# Altium PCB IDC_BNC_Adapter.PCBDOC
Units mil, origin at the board's own origin, x right, y up, seen from the top; angles counter-clockwise.
Board outline 1764.14 x 3937 mil, 4 copper layers (TopLayer, Internal Plane 2, Signal Layer 1, BottomLayer), stack 61.54 mil thick; 45 components, 43 nets, 118 pads, 31 vias.
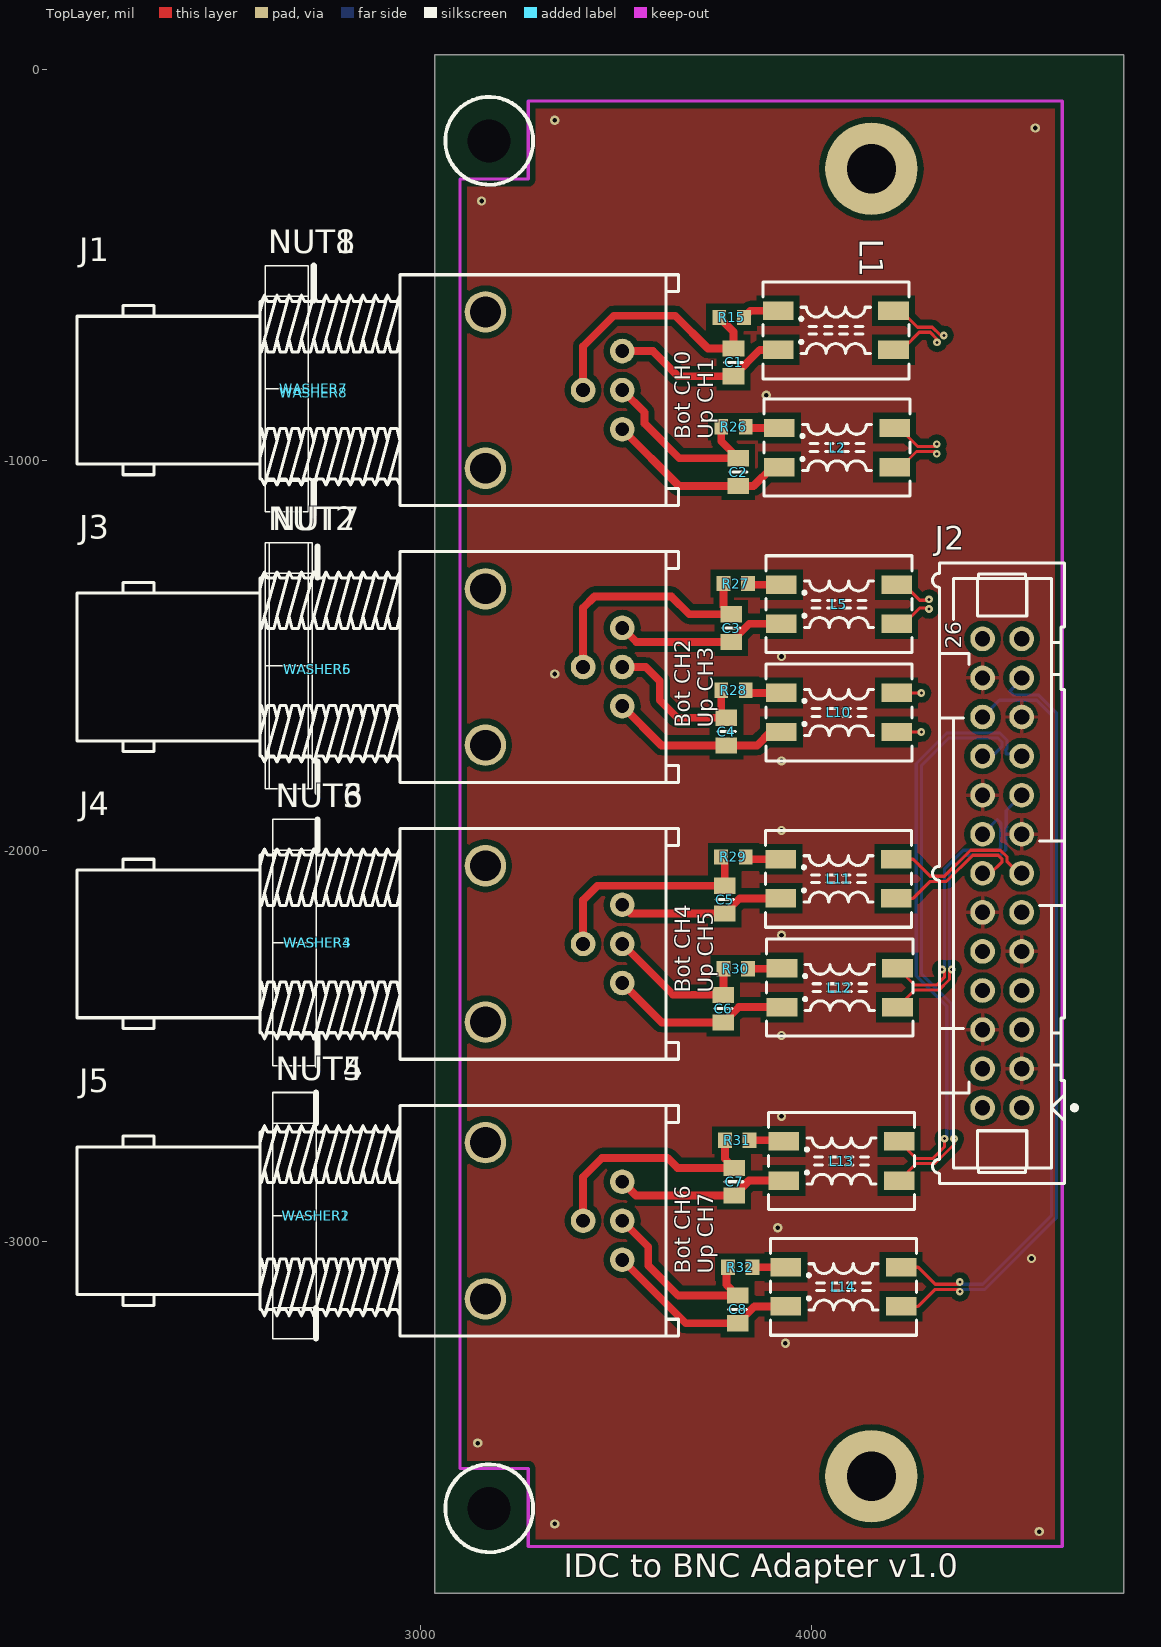
[diagram p0: TopLayer view]
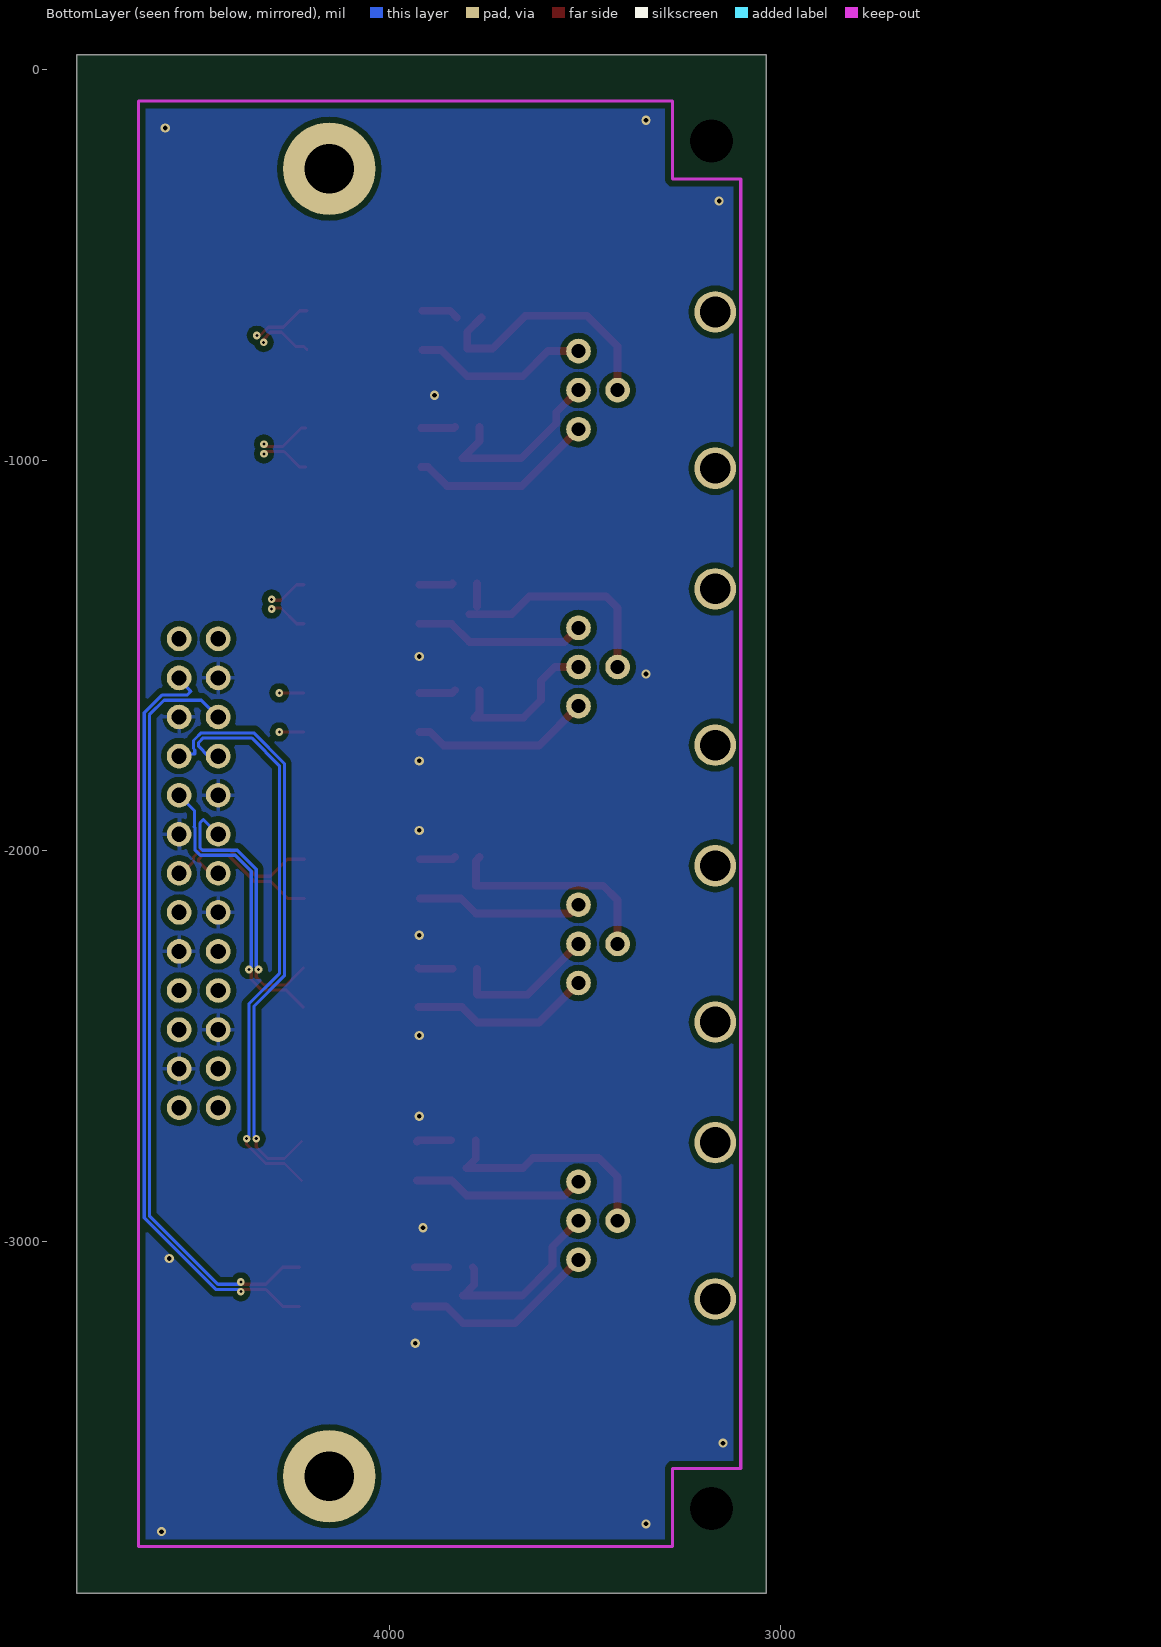
[diagram p1: BottomLayer view, seen from below]
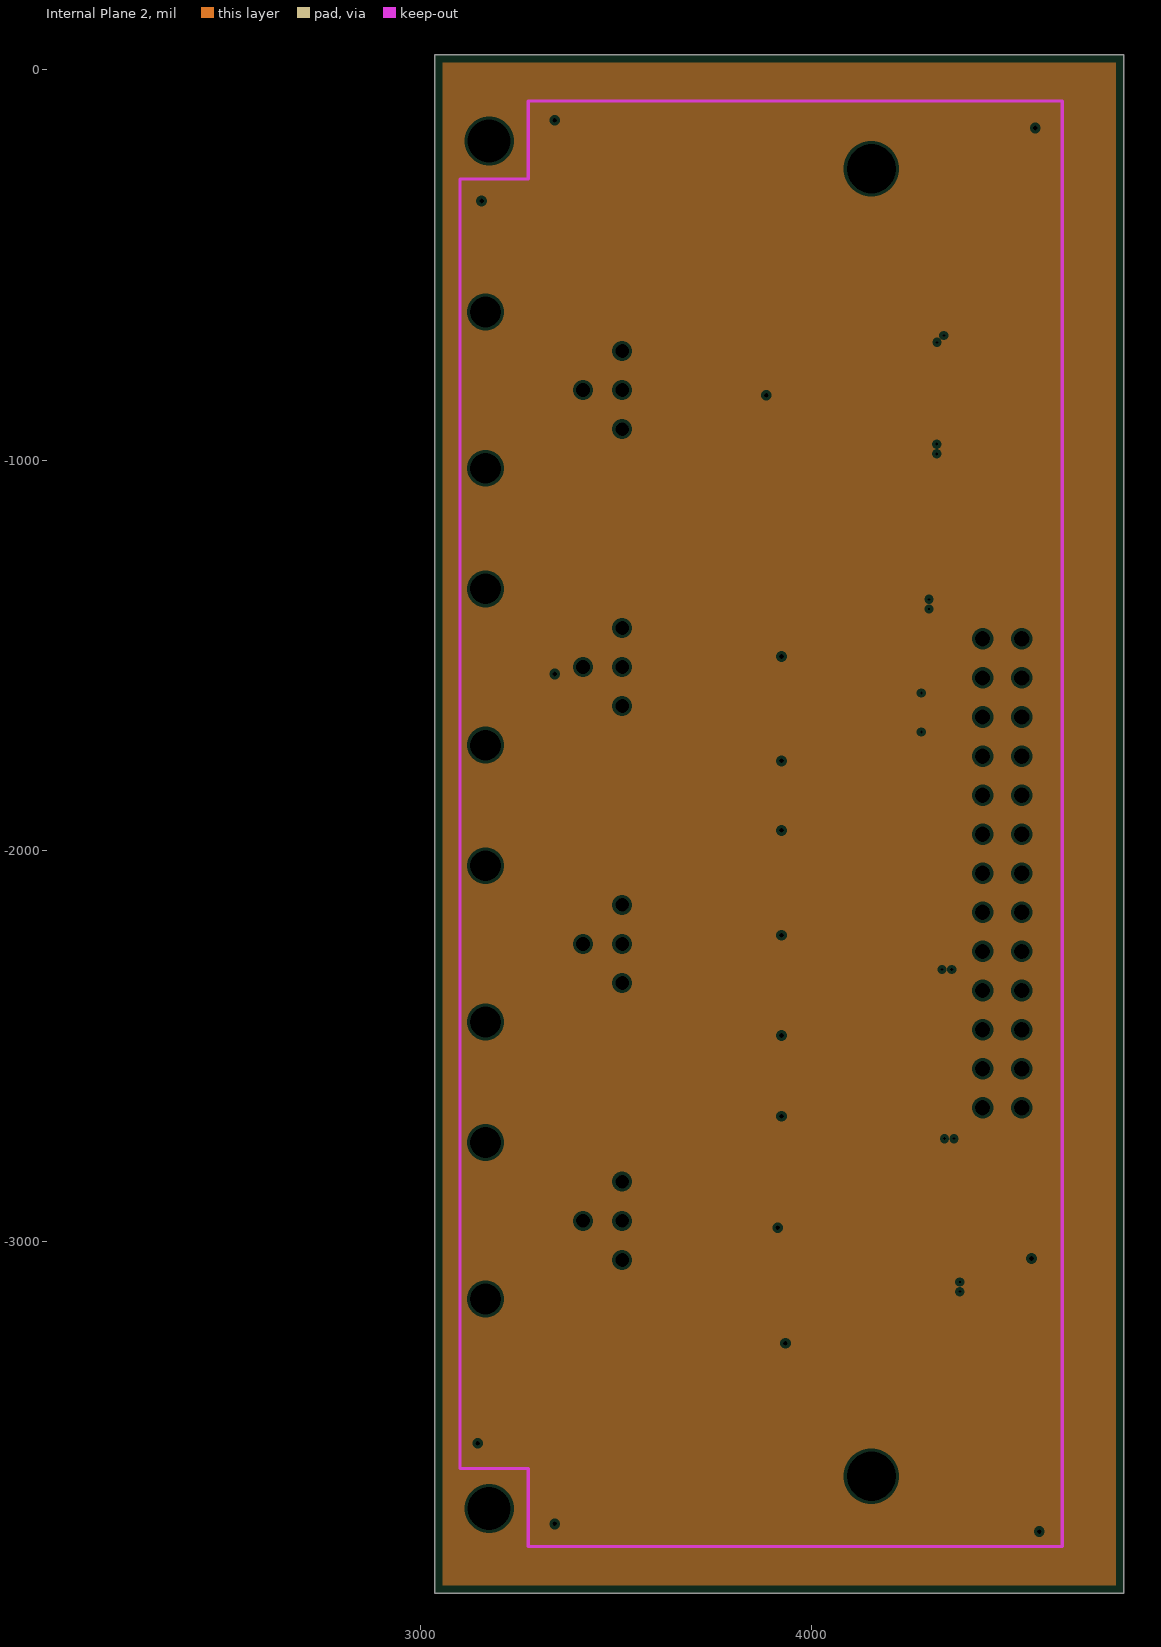
[diagram p2: Internal Plane 2, clearances drawn from the general rule]
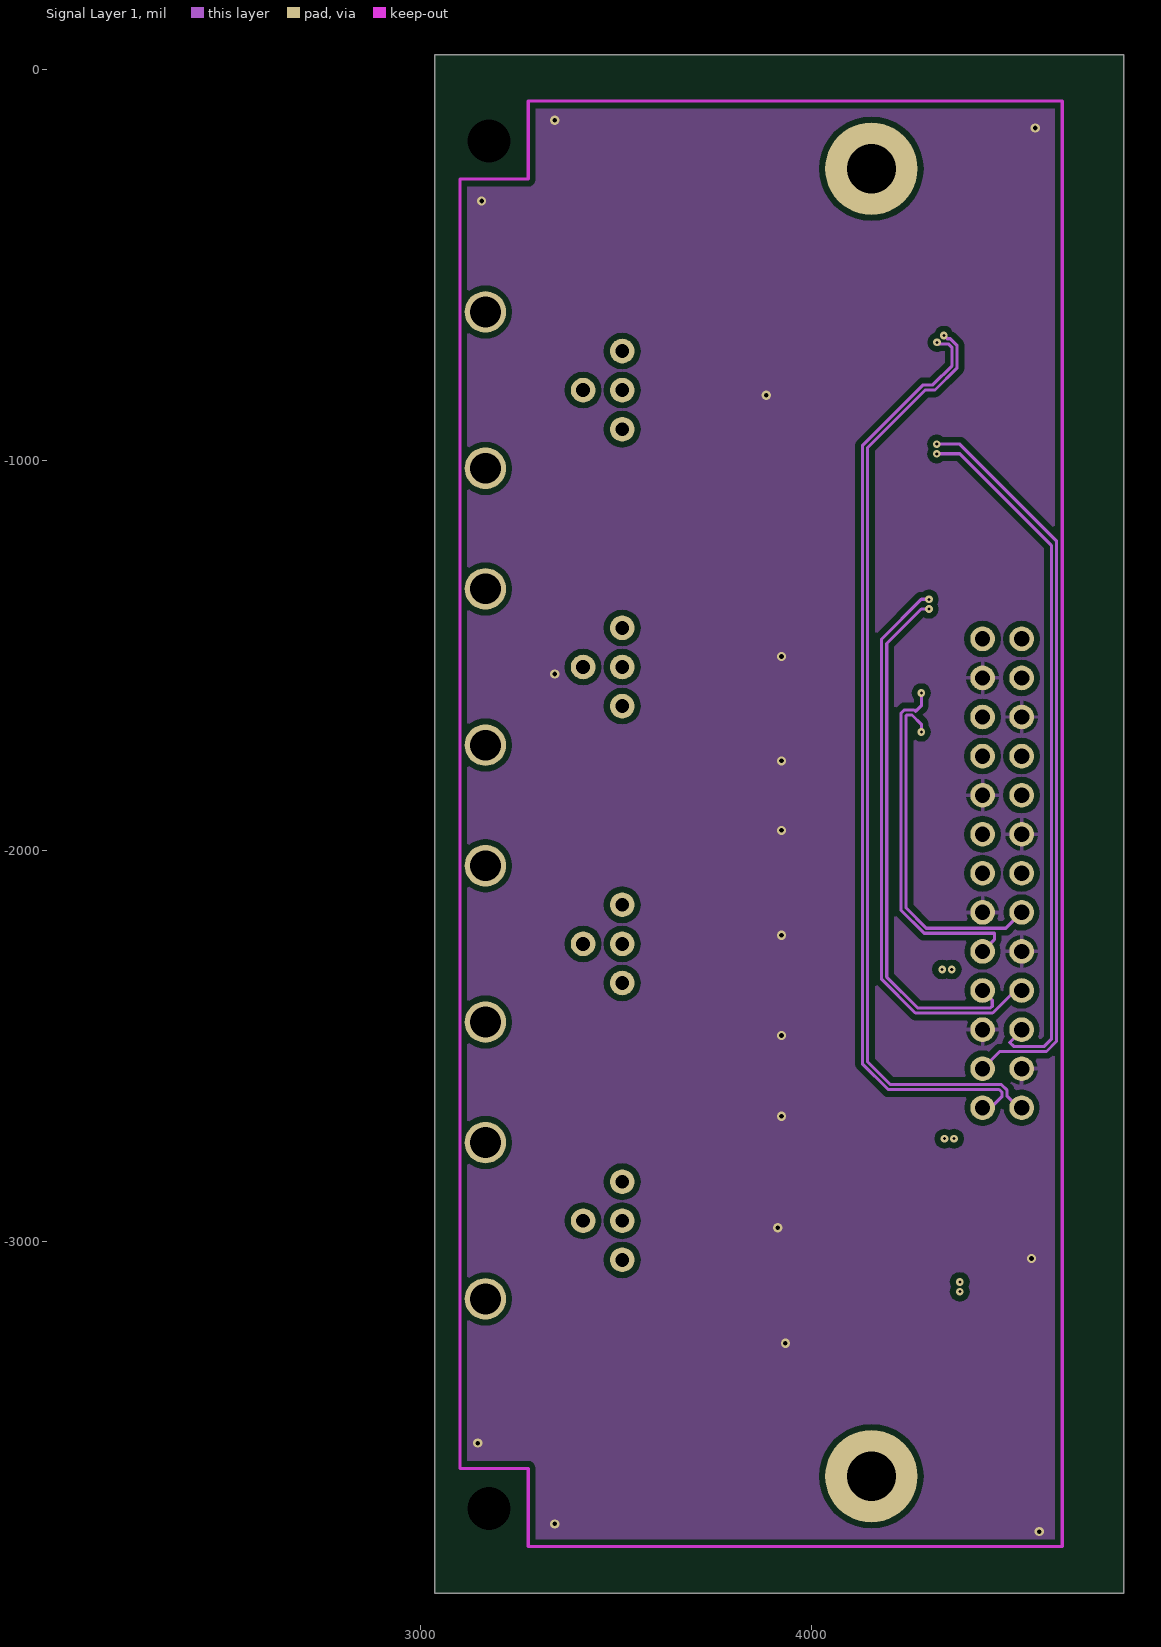
[diagram p3: Signal Layer 1]

## Layer stack, top to bottom
TopSolder: solder mask 0.4, Solder Resist, Dk 3.5
TopLayer: signal copper 1.4
Dielectric1: core 14.1732, FR-4, Dk 4.8
Internal Plane 2: plane copper 1.4169
Dielectric 3: prepreg 27.5591, Dk 4.2
Signal Layer 1: signal copper 1.4173
Dielectric 5: core 14.1732, Dk 4.2
BottomLayer: signal copper 1.4
BottomSolder: solder mask 0.4, Solder Resist, Dk 3.5

## Board outline
4799.68,37.6 4799.68,-3899.4 3035.54,-3899.4 3035.54,37.6

## Design rules (kind name [scope] priority, off if disabled: settings)
Clearance Clearance_DIFF [(InDifferentialPairClass('All Differential Pairs')and IsTrack ) vs (InDifferentialPairClass('All Differential Pairs') and IsTrack  )] p1 off: gap=20 ignorepadtopadclearanceinfootprint=FALSE except(0: Arc-Hole Track-Hole SMDPad-Hole THPad-Hole Via-Hole Fill-Hole Poly-Hole Region-Hole Text-Hole; 5: SMDPad-SMDPad SMDPad-THPad SMDPad-Via SMDPad-Fill SMDPad-Poly SMDPad-Region SMDPad-Text THPad-THPad THPad-Via THPad-Fill THPad-Poly THPad-Region THPad-Text Via-Via Via-Fill Via-Poly Via-Region Via-Text)
Clearance [All] p2: gap=5 ignorepadtopadclearanceinfootprint=FALSE except(0: Arc-Hole Track-Hole SMDPad-Hole THPad-Hole Via-Hole Fill-Hole Poly-Hole Region-Hole Text-Hole; 15: Arc-Poly Track-Poly SMDPad-Poly THPad-Poly Via-Poly Fill-Poly Poly-Poly)
ComponentClearance [All] p1: gap=0 collisioncheckmode=3 verticalgap=100000 showdistances=FALSE
DiffPairsRouting [All] p1: maxlimit=6 minlimit=5 mostfreqgap=6 toplayer_minwidth=5 toplayer_maxwidth=6 toplayer_prefwidth=6 midlayer1_minwidth=5 midlayer1_maxwidth=6 midlayer1_prefwidth=6 bottomlayer_minwidth=5 bottomlayer_maxwidth=6 bottomlayer_prefwidth=6 maxuncoupledlength=500
FabricationTestPointUsage TestPointUsage [All] p1: valid=0 allowmultiple=FALSE
FabricationTestpoint Testpoint [All] p1: side=3 testpointundercomponent=TRUE minsize=40 maxsize=100 preferedsize=60 minholesize=20 maxholesize=40 preferedholesize=32 testpointgrid=1 allowsidetop=TRUE allowsidebottom=TRUE usegrid=TRUE gridtolerance=0.01
Height [All] p1: minheight=0 maxheight=1574.8 prefheight=1574.8
HoleSize [All] p1: absolutevalues=TRUE maxlimit=150 minlimit=1 maxpercent=80.000 minpercent=20.000
HoleToHoleClearance [All] p1: gap=1 allowstackedmicrovias=TRUE
MinimumSolderMaskSliver [All] p1: minsoldermaskwidth=0
PlaneClearance [All] p1: clearance=7.87
PlaneConnect [All] p1: planeconnectstyle=Direct reliefexpansion=20 reliefentries=4 reliefconductorwidth=10 reliefairgap=10
PolygonConnect PolygonConnect_pad [(InPadClass('All Pads'))] p1: connectstyle=Relief reliefconductorwidth=10 reliefentries=4 polygonreliefangle="90 Angle" airgapwidth=10
PolygonConnect [All] p2: connectstyle=Direct reliefconductorwidth=10 reliefentries=4 polygonreliefangle="45 Angle" airgapwidth=10
RoomDefinition Zotino_BNC_Adapter [InComponentClass('Zotino_BNC_Adapter')] p1: confinementstyle=ConfineIn formatcopy=TRUE lockcomponents=FALSE outline 4760.31,27.76 4661.88,27.76 4661.88,-612 4760.31,-612
RoutingVias [All] p1: holewidth=7.87 width=19.68 viastyle="Through Hole" minholewidth=7.87 minwidth=19.68 maxholewidth=28 maxwidth=50
SilkToSilkClearance [All] p1: silktosilkclearance=0
SilkToSolderMaskClearance SilkscreenOverComponentPads [IsPad] p1: minsilkscreentomaskgap=0 clearancetoexposedcopper=TRUE
SolderMaskExpansion [All] p1: expansion=2
ViasUnderSMD [All] p1: allowed=FALSE
Width [All] p1: maxlimit=50 minlimit=5 preferedwidth=5
18 further rules are at their usual default settings.

## Components (designator, comment, footprint, x,y, rotation, side; value= is the part's Value field where it differs from the comment)
C1 "Undefined" CAPC2012X135N 3800.75,-749.4 r90 top
C2 "Undefined" CAPC2012X135N 3812.75,-1030.4 r90 top
C3 "Undefined" CAPC2012X135N 3794.75,-1429.4 r90 top
C4 "Undefined" CAPC2012X135N 3782.75,-1694.4 r90 top
C5 "Undefined" CAPC2012X135N 3778.54,-2124.25 r90 top
C6 "Undefined" CAPC2012X135N 3774.75,-2403.59 r90 top
C7 "Undefined" CAPC2012X135N 3802.17,-2846.46 r90 top
C8 "Undefined" CAPC2012X135N 3811.17,-3173.46 r90 top
J1 "BNC" RENHOTEC_RHT-610-0049 3271.76,-820.42 r180 top
J2 "Header 26" 3M_N2526-6003RB 4488.19,-2057.09 r90 top
J3 "BNC" RENHOTEC_RHT-610-0049 3271.75,-1529.09 r180 top
J4 "BNC" RENHOTEC_RHT-610-0049 3271.75,-2237.75 r180 top
J5 "BNC" RENHOTEC_RHT-610-0049 3271.75,-2946.41 r180 top
L1 "2x6.5mH" IND_WURTH_WE-SL2 4062.75,-667.4 r0 top
L2 "2x6.5mH" IND_WURTH_WE-SL2 4065.75,-967.4 r0 top
L5 "2x6.5mH" IND_WURTH_WE-SL2 4070.75,-1368.4 r0 top
L10 "2x6.5mH" IND_WURTH_WE-SL2 4070.75,-1645.4 r0 top
L11 "2x6.5mH" IND_WURTH_WE-SL2 4069.54,-2071.25 r0 top
L12 "2x6.5mH" IND_WURTH_WE-SL2 4072.75,-2349.59 r0 top
L13 "2x6.5mH" IND_WURTH_WE-SL2 4077.17,-2793.46 r0 top
L14 "2x6.5mH" IND_WURTH_WE-SL2 4082.17,-3115.46 r0 top
NUT1 "BNC Nut" TE_1-329631-2 2657.48,-816.93 r0 top
NUT2 "BNC Nut" TE_1-329631-2 2657.48,-1525.59 r0 top
NUT3 "BNC Nut" TE_1-329631-2 2677.17,-2234.25 r0 top
NUT4 "BNC Nut" TE_1-329631-2 2677.17,-2933.07 r0 top
NUT5 "BNC Nut" TE_1-329631-2 2677.17,-2933.07 r0 top
NUT6 "BNC Nut" TE_1-329631-2 2677.17,-2234.25 r0 top
NUT7 "BNC Nut" TE_1-329631-2 2667.32,-1525.59 r0 top
NUT8 "BNC Nut" TE_1-329631-2 2657.48,-816.93 r0 top
R15 "0" RESC1608X55N 3795.75,-634.4 r0 top
R26 "0" RESC1608X55N 3800.75,-914.4 r0 top
R27 "0" RESC1608X55N 3806.75,-1315.4 r0 top
R28 "0" RESC1608X55N 3800.75,-1588.4 r0 top
R29 "0" RESC1608X55N 3800.54,-2015.25 r0 top
R30 "0" RESC1608X55N 3806.75,-2301.59 r0 top
R31 "0" RESC1608X55N 3810.17,-2740.46 r0 top
R32 "0" RESC1608X55N 3818.17,-3065.46 r0 top
WASHER1 "D15.8d12.75" TE_1-1634817-0 2732.28,-2933.07 r0 top
WASHER2 "D15.8d12.75" TE_1-1634817-0 2732.28,-2933.07 r0 top
WASHER3 "D15.8d12.75" TE_1-1634817-0 2736.22,-2234.25 r0 top
WASHER4 "D15.8d12.75" TE_1-1634817-0 2736.22,-2234.25 r0 top
WASHER5 "D15.8d12.75" TE_1-1634817-0 2736.22,-1535.43 r0 top
WASHER6 "D15.8d12.75" TE_1-1634817-0 2736.22,-1535.43 r0 top
WASHER7 "D15.8d12.75" TE_1-1634817-0 2726.38,-816.93 r0 top
WASHER8 "D15.8d12.75" TE_1-1634817-0 2726.38,-826.77 r0 top

## Footprints (in the part's own frame and the unit in brackets; to place one, negate y for a bottom-side part, rotate by r counter-clockwise, add the part's x,y. Pads: shape width x height; smd on the part's side, far side on the other; paste and mask are expansions set on the pad)
3M_N2526-6003RB [mm] "26 Contacts - Straight .100\" x .100\" Low Profile Four-Wall Header"
  round 1.6 hole 1: 1(-15.24,-1.27) 2(-15.24,1.27) 3(-12.7,-1.27) 4(-12.7,1.27) 5(-10.16,-1.27) 6(-10.16,1.27) 7(-7.62,-1.27) 8(-7.62,1.27) 9(-5.08,-1.27) 10(-5.08,1.27) 11(-2.54,-1.27) 12(-2.54,1.27) 13(0,-1.27) 14(0,1.27) 15(2.54,-1.27) 16(2.54,1.27) 17(5.08,-1.27) 18(5.08,1.27) 19(7.62,-1.27) 20(7.62,1.27) 21(10.16,-1.27) 22(10.16,1.27) 23(12.7,-1.27) 24(12.7,1.27) 25(15.24,-1.27) 26(15.24,1.27)
  silkscreen extent -20.17,-4.85 20.17,4.52, body extent -20.17,-4.11 20.17,4.52, height 9.91
CAPC2012X135N [mm] "Chip Capacitor, Body 2.0x1.25mm, IPC Medium Density"
  rect 1.05x1.4 smd: 1(-0.9,0) 2(0.9,0)
  silkscreen extent 0,-0.58 0,0.58, body extent -1.05,-0.67 1.05,0.68, height 1.25
IND_WURTH_WE-SL2 [mm] "Common Mode SMD Line Filter WE-SL2"
  rect 2x1.2 smd: 1(-3.75,1.27) 2(-3.75,-1.27) 3(3.75,-1.27) 4(3.75,1.27)
  silkscreen extent -4.75,-3.15 4.75,3.15, body extent -4.75,-3.15 4.75,3.15, height 5.3
RENHOTEC_RHT-610-0049 [mm] "Dual Right Angle 50 Ohm BNC Jack, White Valox Case"
  round 1.6 hole 0.9: 1(-6.2,-2.54) 2(-6.2,0) 3(-6.2,2.54) 4(-3.66,0)
  round 2.7 hole 2: 6(2.69,-5.08) 7(2.69,5.08)
  silkscreen extent -9.85,-7.5 29.25,7.5, body extent -9.85,-7.5 29.25,7.5, height 29.3
RESC1608X55N [mm] "Chip Resistor, EIA 0603, Metric 1608, Body 1.6x0.8mm, IPC Medium Density"
  rect 0.9x1 smd: 1(-0.8,0) 2(0.8,0)
  body extent -0.87,-0.47 0.88,0.48, height 0.55
TE_1-329631-2 [mil]
  silkscreen extent -55,-315 55,315
TE_1-1634817-0 [mil]
  silkscreen extent 0,-315 0,315

## Part data
C1 C2 C3 C4 C5 C6 C7 C8: library part CC0805_NO-VALUE, "Non-polarised capacitor", Case=0805, Manufacturer1 ComponentHeight=1.35mm, Author="CERN DEM JLC", Component Type=Standard, CreateDate=10.12.2008, HelpURL=Undefined, LatestRevisionDate=11.09.2013, Manufacturer=Undefined, Manufacturer Part Number=CC0805_NO-VALUE, Mounted=No, Part Description="Reserved Footprint For 0805(2012) Chip Ceramic Capacitor", Part Number=CC0805_NO-VALUE, Pin Count=2, Sense=No, SMD=Yes, Socket=No, Status=None
J1 J3 J4 J5: "Dual Right Angle 50 Ohm BNC Jack, White Valox Case", Manufacturer=RENHOTEC, Manufacturer Part Number=RHT-610-0049, Part Number=RENHOTEC_RHT-610-0049, Author=GK, ComponentHeight=29.3mm, Component Type=Standard, CreateDate=09.04.2013, Family=BNC, HelpURL=\\cern.ch\dfs\Applications\Altium\Datasheets\BOMAR_364A2595.pdf, LatestRevisionDate=09.04.2013, Mounted=Yes, Part Description="Dual Right Angle 50 Ohm BNC Jack, White Valox Case", Pin Count=6, PressFit=No, Sense=No, SMD=No, Socket=No, Status=None
J2: library part 3M_N2526-6003RB, "Connector 26 Male", Manufacturer=3M, Manufacturer Part Number=N2526-6003RB, Author="CERN DEM JLC", ComponentHeight=9.91mm, Component Type=Standard, CreateDate=22.01.2014, Family="Header 26", HelpURL=\\cern.ch\dfs\Applications\Altium\Datasheets\3M_N2526-6003RB.pdf, LatestRevisionDate=22.01.2014, Mounted=Yes, Part Description="26 Contacts - Straight .100'' x .100'' Low Profile Four-Wall Header, 2500 Series", Part Number=3M_N2526-6003RB, Pin Count=26, PressFit=No, Sense=No, SMD=No, Socket=No, Status=None
L1 L2 L5 L10 L11 L12 L13 L14: library part IND_6.5MH_50%_WURTH_WE-SL2-744229, "Inductor Common Mode", Manufacturer="WURTH ELEKTRONIK", Manufacturer Part Number=744229, Power=400mA, Resistance=0.95R, Tolerance=±50%, Author="CERN DEM JLC", ComponentHeight=5.3mm, Component Type=Standard, CreateDate=01.10.2012, HelpURL=\\cern.ch\dfs\Applications\Altium\Datasheets\IND_WURTH_WE-SL2_744229.pdf, LatestRevisionDate=15.10.2012, Mounted=Yes, Part Description="Common Mode SMD Line Filter (WE-SL2 Serie)", Part Number=IND_6.5MH_50%_WURTH_WE-SL2-744229, Pin Count=4, Sense=No, SMD=Yes, Socket=No, Status=None
NUT1 NUT2 NUT3 NUT4 NUT5 NUT6 NUT7 NUT8: "BNC nut", Manufacturer=TE, Manufacturer Part Number=1-329631-2, Part Number=TE_1-329631-2, Author="CERN DEM JLC", ComponentHeight=3.2mm, Component Type=Mechanical, CreateDate=17.04.2014, HelpURL=\\cern.ch\dfs\Applications\Altium\Datasheets\BOSSARD_BN81-1400428.pdf, LatestRevisionDate=17.04.2014, Mounted=Yes, PackageDescription="BNC NUT 1/2-28UNEF-2B", Part Description="BNC NUT 1/2-28UNEF-2B", Pin Count=0, PressFit=No, Sense=No, SMD=No, Socket=No, Status=None
R15 R26 R27 R28 R29 R30 R31 R32: library part R0603_0R_JUMPER, "Resistor", Case=0603, Manufacturer=GENERIC, Manufacturer1 ComponentHeight=0.55mm, Manufacturer1 Example="NIC COMPONENT", Manufacturer1 Part Number=NRC06Z0, Author="CERN DEM JLC", Component Type=Standard, CreateDate=03.12.2007, HelpURL=\\cern.ch\dfs\Applications\Altium\Datasheets\R0603_NIC_NRC.pdf, LatestRevisionDate=13.03.2008, Manufacturer Part Number=R0603_0R_JUMPER, Mounted=Yes, Part Description="1A (0.05R Max DC Resistance) Zero Ohm Jumper", Part Number=R0603_0R_JUMPER, Pin Count=2, Sense=No, SMD=Yes, Socket=No, Status=Preferred
WASHER1 WASHER2 WASHER3 WASHER4 WASHER5 WASHER6 WASHER7 WASHER8: "BNC Washer", Manufacturer=TE, Manufacturer Part Number=1-1634817-0, Part Number=TE_1-1634817-0, Author=GK, ComponentHeight=0.5mm, Component Type=Mechanical, CreateDate=27.04.2017, HelpURL=\\cern.ch\dfs\Applications\Altium\Datasheets\BOSSARD_BN83728-8243972.pdf, LatestRevisionDate=27.04.2017, Mounted=Yes, PackageDescription="BNC washer", Part Description="BNC washer", Pin Count=0, PressFit=No, Sense=No, SMD=No, Socket=No, Status=None

## Free pads (board coordinates)
  round 50 hole 110: 1(3175.54,-182.4) 2(3175.54,-3682.4)
  round 236.22 hole 125.98: 2(4153.65,-253.73) 3(4153.65,-3600.19)

## Via types
v1: diameter 23.62, hole 11.81, TopLayer to BottomLayer, tented both sides, 17 vias
v2: diameter 19.68, hole 7.87, TopLayer to BottomLayer, 14 vias

## Nets (pads, with @x,y where several pads share a name; then routed paths per layer and width w, separated by ;. In a path a pad name is that pad's centre, name@x,y a point inside that pad or via, vN(x,y) a via of type N, cw(c..) or ccw(c..) an arc to the next point about the centre after c; other vN are vias at no path point)
CH0: C1.2 J1.4 R15.1 | length 659.1
  TopLayer w20: J1.4 3415.85,-708.17 3494.09,-629.92 3651.57,-629.92 3735.62,-713.97 C1.2 3800.75,-670.9 R15.1
CH1: C2.2 J1.2 R26.1 | length 484.3
  TopLayer w20: J1.2 3572.83,-877.4 3572.83,-905.51 3662.29,-994.97 C2.2 3769.25,-951.47 R26.1
CH2: C3.2 J3.4 R27.1 | length 620.5
  TopLayer w20: J3.4 3415.85,-1377.46 3444.88,-1348.43 3641.73,-1348.43 3687.28,-1393.97 C3.2 ; C3.2@3775.25,-1374.47 R27.1
CH3: C4.2 J3.2 R28.1 | length 425.7
  TopLayer w20: J3.2 3576.33,-1529.09 3612.2,-1564.96 3612.2,-1614.17 3657,-1658.97 C4.2 3769.25,-1645.47 R28.1
CH4: C5.2 J4.4 R29.1 | length 567.6
  TopLayer w20: J4.4 3415.85,-2125.49 3452.53,-2088.81 C5.2 3778.54,-2024.74 R29.1
CH5: C6.2 J4.2 R30.1 | length 380.1
  TopLayer w20: J4.2 3646.26,-2368.16 C6.2@3773.81,-2368.16 ; C6.2 C6.2@3773.81,-2368.16 ; R30.1 3775.25,-2366.71 C6.2@3773.81,-2368.16
CH6: C7.2 J5.4 R31.1 | length 609.7
  TopLayer w20: J5.4 3415.85,-2834.15 3464.57,-2785.43 3631.89,-2785.43 3657.48,-2811.03 C7.2 3778.67,-2787.53 R31.1
CH7: C8.2 J5.2 R32.1 | length 488.8
  TopLayer w20: J5.2 3582.68,-3013.24 3582.68,-3061.02 3659.68,-3138.03 C8.2 3782.56,-3109.42 3782.56,-3069.57 R32.1
DAC_OUTN0: J2.2 L1.3 | length 2592.1
  TopLayer w8: L1.3 4219.13,-708.66 4239.92,-708.66 4276.13,-672.45 4304.34,-672.45 4321.66,-689.77 v2(4321.66,-698.03)
  Signal Layer 1 w8: v2(4321.66,-698.03) 4325.6,-701.98 4350.39,-701.98 4360.24,-711.82 4360.24,-757.87 4311.02,-807.09 4285.95,-807.09 4130.7,-962.34 4130.7,-2544.75 4196.53,-2610.58 4480.66,-2610.58 4488.19,-2618.11 4488.19,-2627.95 4459.05,-2657.09 J2.2
DAC_OUTN1: J2.5 L2.3 | length 1944.7
  TopLayer w8: L2.3 4229.45,-1017.4 4269.29,-977.57 4315.02,-977.57 v2(4320.87,-983.41)
  Signal Layer 1 w8: v2(4320.87,-983.41) 4379.92,-983.41 4614.19,-1217.68 4614.19,-2482.27 4596.46,-2500 4517.72,-2500 4507.87,-2490.16 4538.19,-2459.85 J2.5
DAC_OUTN2: J2.8 L5.3 | length 1454.3
  TopLayer w8: L5.3 4236.99,-1418.4 4277.44,-1377.95 4298.68,-1377.95 v2(4301.18,-1380.45)
  Signal Layer 1 w8: v2(4301.18,-1380.45) 4281.5,-1380.45 4192.91,-1469.04 4192.91,-2322.83 4271.65,-2401.57 4458.66,-2401.57 4462.99,-2397.25 4462.99,-2381.89 J2.8
DAC_OUTN3: J2.11 L10.3 | length 959.2
  TopLayer w8: L10.3 v2(4281.5,-1695.4)
  Signal Layer 1 w8: v2(4281.5,-1695.4) 4281.5,-1675.64 4257.76,-1651.9 4243.77,-1651.9 4242.13,-1653.54 4242.13,-2145.67 4294.04,-2197.58 4497.69,-2197.58 J2.11
DAC_OUTN4: J2.14 L11.3 | length 389.7
  TopLayer w8: L11.3 4260.55,-2121.25 4304.05,-2077.75 4345.94,-2077.75 4412.65,-2011.03 4478.35,-2011.03 4488.19,-2020.87 4488.19,-2027.56 4458.66,-2057.09 J2.14
DAC_OUTN5: J2.17 L12.3 | length 768.9
  TopLayer w8: L12.3 4263.89,-2356.09 4326.25,-2356.09 4353.55,-2328.79 4353.55,-2308.99 v2(4359.39,-2303.15)
  BottomLayer w8: v2(4359.39,-2303.15) 4353.55,-2297.31 4353.55,-2051.75 4394.27,-2011.03 4483.73,-2011.03 4497.69,-1997.07 4497.69,-1940.31 4500.11,-1937.9 4498.9,-1936.69 4498.9,-1896.37 J2.17
DAC_OUTN6: J2.20 L13.3 | length 1494.1
  TopLayer w8: L13.3 4268.31,-2799.96 4316.41,-2799.96 4365.24,-2751.13 v2(4365.24,-2736.22)
  BottomLayer w8: v2(4365.24,-2736.22) 4359.39,-2730.38 4359.39,-2391.72 4281.5,-2313.83 4281.5,-1781.5 4352.41,-1710.58 4476.33,-1710.58 4488.19,-1722.44 4488.19,-1732.28 4463.38,-1757.09 J2.20
DAC_OUTN7: J2.23 L14.3 | length 1977.7
  TopLayer w8: L14.3 4273.18,-3165.46 4316.68,-3121.96 4374.08,-3121.96 v2(4379.92,-3127.8)
  BottomLayer w8: v2(4379.92,-3127.8) 4385.76,-3121.96 4444.36,-3121.96 4627.19,-2939.13 4627.19,-1646.21 4585.96,-1604.98 4582.16,-1601.17 4517.72,-1601.17 4507.87,-1591.33 4538.19,-1561.02 J2.23
DAC_OUTP0: J2.1 L1.4 | length 2594.6
  TopLayer w8: L1.4 4229.61,-617.4 4271.65,-659.45 4309.72,-659.45 4330.85,-680.57 v2(4339.11,-680.57)
  Signal Layer 1 w8: v2(4339.11,-680.57) 4347.51,-688.98 4355.78,-688.98 4373.24,-706.43 4373.24,-763.26 4316.41,-820.09 4291.34,-820.09 4143.7,-967.72 4143.7,-2539.37 4201.91,-2597.58 4486.05,-2597.58 4501.19,-2612.73 4501.19,-2627.95 4530.32,-2657.09 J2.1
DAC_OUTP1: J2.4 L2.4 | length 2037.6
  TopLayer w8: L2.4 4225.28,-917.4 4272.44,-964.57 4315.02,-964.57 v2(4320.87,-958.72)
  Signal Layer 1 w8: v2(4320.87,-958.72) 4379.92,-958.72 4627.19,-1205.99 4627.19,-2487.65 4601.84,-2513 4482.27,-2513 J2.4
DAC_OUTP2: J2.7 L5.4 | length 1552.4
  TopLayer w8: L5.4 4237.58,-1318.4 4277.44,-1358.27 4298.68,-1358.27 v2(4301.18,-1355.77)
  Signal Layer 1 w8: v2(4301.18,-1355.77) 4281.5,-1355.77 4179.91,-1457.35 4179.91,-2328.22 4266.27,-2414.57 4464.05,-2414.57 4521.53,-2357.09 J2.7
DAC_OUTP3: J2.10 L10.4 | length 985.7
  TopLayer w8: L10.4 v2(4281.5,-1595.4)
  Signal Layer 1 w8: v2(4281.5,-1595.4) 4281.5,-1628.17 4266.95,-1642.71 4263.14,-1638.9 4238.38,-1638.9 4234.57,-1642.71 4232.93,-1644.35 4229.13,-1648.16 4229.13,-2151.05 4285.95,-2207.88 4288.66,-2210.58 4468.5,-2210.58 4468.5,-2226.77 J2.10
DAC_OUTP4: J2.13 L11.4 | length 398.2
  TopLayer w8: L11.4 4260.55,-2021.25 4304.05,-2064.75 4340.55,-2064.75 4407.27,-1998.03 4483.73,-1998.03 4501.19,-2015.49 4501.19,-2027.56 4530.72,-2057.09 J2.13
DAC_OUTP5: J2.16 L12.4 | length 724.5
  TopLayer w8: L12.4 4263.89,-2343.09 4320.87,-2343.09 4340.55,-2323.41 4340.55,-2308.99 v2(4334.71,-2303.15)
  BottomLayer w8: v2(4334.71,-2303.15) 4340.55,-2297.31 4340.55,-2046.36 4388.88,-1998.03 4478.35,-1998.03 4484.69,-1991.69 4484.69,-1927.92 4476.06,-1919.29 4438.26,-1957.09 J2.16
DAC_OUTP6: J2.19 L13.4 | length 1513.9
  TopLayer w8: L13.4 4268.31,-2786.96 4311.02,-2786.96 4340.55,-2757.43 v2(4340.55,-2736.22)
  BottomLayer w8: v2(4340.55,-2736.22) 4346.39,-2730.38 4346.39,-2397.11 4268.5,-2319.21 4268.5,-1776.11 4347.02,-1697.58 4481.72,-1697.58 4497.38,-1713.25 4501.19,-1717.06 4501.19,-1737.67 4497.38,-1741.48 4498.03,-1742.13 4498.03,-1751.32 4532.42,-1751.32 J2.19
DAC_OUTP7: J2.22 L14.4 | length 1971.3
  TopLayer w8: L14.4 4273.18,-3065.46 4316.68,-3108.96 4374.08,-3108.96 v2(4379.92,-3103.12)
  BottomLayer w8: v2(4379.92,-3103.12) 4385.76,-3108.96 4438.98,-3108.96 4614.19,-2933.75 4614.19,-1651.59 4576.77,-1614.17 4481.1,-1614.17 J2.22
GNDP: J2.3 J2.6 J2.9 J2.12 J2.15 J2.18 J2.21 J2.24
  other v1: 4583.14,-3741.92 3342.99,-3722.24 3146.14,-3515.55 3933.54,-3259.64 4563.46,-3043.1 3913.85,-2964.36 3923.69,-2678.93 3923.69,-2472.24 3923.69,-2215.73 3923.69,-1947.23 3923.69,-1769.42 3342.99,-1547.04 3923.69,-1502.26 3884.32,-833.55 3155.98,-336.41 4573.3,-149.4 3342.99,-129.72
N13V0_SCSI: J2.26
NetC1_1: C1.1 J1.1 L1.2 | length 453.9
  TopLayer w20: J1.1 3594.44,-720.42 3658.85,-784.84 C1.1 3868.18,-717.4 L1.2
NetC2_1: C2.1 J1.3 L2.2 | length 482.6
  TopLayer w20: J1.3 3661.27,-1065.84 C2.1 3852.13,-1065.84 3900.56,-1017.4 L2.2
NetC3_1: C3.1 J3.1 L5.2 | length 441.3
  TopLayer w20: J3.1 3551.6,-1464.84 C3.1 3841.18,-1418.4 L5.2
NetC4_1: C4.1 J3.3 L10.2 | length 463.3
  TopLayer w20: J3.3 3616.6,-1729.84 C4.1 3861.13,-1729.84 3895.56,-1695.4 L10.2
NetC5_1: C5.1 J4.1 L11.2 | length 431.1
  TopLayer w20: J4.1 3537.78,-2159.68 C5.1 3816.97,-2121.25 L11.2
NetC6_1: C6.1 J4.3 L12.2 | length 467.6
  TopLayer w20: J4.3 3617.12,-2439.03 C6.1 3814.18,-2399.59 L12.2
NetC7_1: C7.1 J5.1 L13.2 | length 444.3
  TopLayer w20: J5.1 3551.33,-2881.89 C7.1 3840.6,-2843.46 L13.2
NetC8_1: C8.1 J5.3 L14.2 | length 504
  TopLayer w20: J5.3 3678.33,-3208.89 C8.1 3854.6,-3165.46 L14.2
NetL1_1: L1.1 R15.2 | length 94.9
  TopLayer w20: R15.2 3844.25,-617.4 L1.1
NetL2_1: L2.1 R26.2 | length 87.1
  TopLayer w20: R26.2 3835.25,-917.4 L2.1
NetL5_1: L5.1 R27.2 | length 86.1
  TopLayer w20: R27.2 3841.25,-1318.4 L5.1
NetL10_1: L10.1 R28.2 | length 93.8
  TopLayer w20: R28.2 3839.25,-1595.4 L10.1
NetL11_1: L11.1 R29.2 | length 92.4
  TopLayer w20: R29.2 3838.03,-2021.25 L11.1
NetL12_1: L12.1 R30.2 | length 87.7
  TopLayer w20: R30.2 3923.11,-2301.59 L12.1
NetL13_1: L13.1 R31.2 | length 89.1
  TopLayer w20: R31.2 3926.53,-2740.46 L13.1
NetL14_1: L14.1 R32.2 | length 84.9
  TopLayer w20: R32.2 L14.1
P13V0_SCSI: J2.25
pads on no net: J1.6 J1.7 J3.6 J3.7 J4.6 J4.7 J5.6 J5.7

## Polygon pours and split planes (outlines as drawn)
GNDP on Signal Layer 1 "L3-No Net" (solid, remove dead copper, pour order 64): 3035.54,-3899.4 3035.54,37.6 4799.68,37.6 4799.68,-3899.4
GNDP on BottomLayer "L3-No Net" (solid, remove dead copper, pour order 66): 3035.54,-3899.4 3035.54,37.6 4799.68,37.6 4799.68,-3899.4
GNDP on TopLayer "L3-No Net" (solid, remove dead copper, pour order 68): 3035.54,-3899.4 3035.54,37.6 4799.68,37.6 4799.68,-3899.4
no net on Internal Plane 2 (split plane): 4779.58,-3879.31 3055.63,-3879.31 3055.63,17.5 4779.58,17.5

## Keep-outs
KeepOutLayer:
  lines w8: 3100.54,-3580.4 3275.54,-3580.4 3275.54,-3780.4 4642.2,-3780.4 4642.2,-80.4 3275.54,-80.4 3275.54,-280.4 3100.54,-280.4 3100.54,-3580.4

## Silkscreen, mask and mechanical layers (free items; w line width, h text height)
TopOverlay:
  circle w10: c3175.54,-3682.4 r112.5
  circle w10: c3175.54,-182.4 r112.5
  text "Bot CH0" at 3689.96,-945.87 h40 r90
  text "Up CH1" at 3749.02,-945.87 h40 r90
  text "Bot CH2" at 3689.96,-1684.06 h40 r90
  text "Up CH3" at 3749.02,-1684.06 h40 r90
  text "Bot CH4" at 3689.96,-2363.19 h40 r90
  text "Up CH5" at 3749.02,-2363.19 h40 r90
  text "Bot CH6" at 3689.96,-3081.69 h40 r90
  text "Up CH7" at 3749.02,-3081.69 h40 r90
  text "IDC to BNC Adapter v1.0" at 3366.14,-3858.27 h60
Mechanical1:
  lines w3.94: 3035.54,-3899.4 3035.54,37.6 4799.68,37.6 4799.68,-1852.17 4799.68,-2245.87 4799.68,-3899.4 3035.54,-3899.4

## Text inside footprints (layer, text, board x,y; h text height)
J2: TopOverlay "26" at 4383.19,-1482.09 h40 r90; Mechanical14 "26" at 4383.19,-1482.09 h40 r90